# EAGLE board displayplank (EAGLE 6.2)
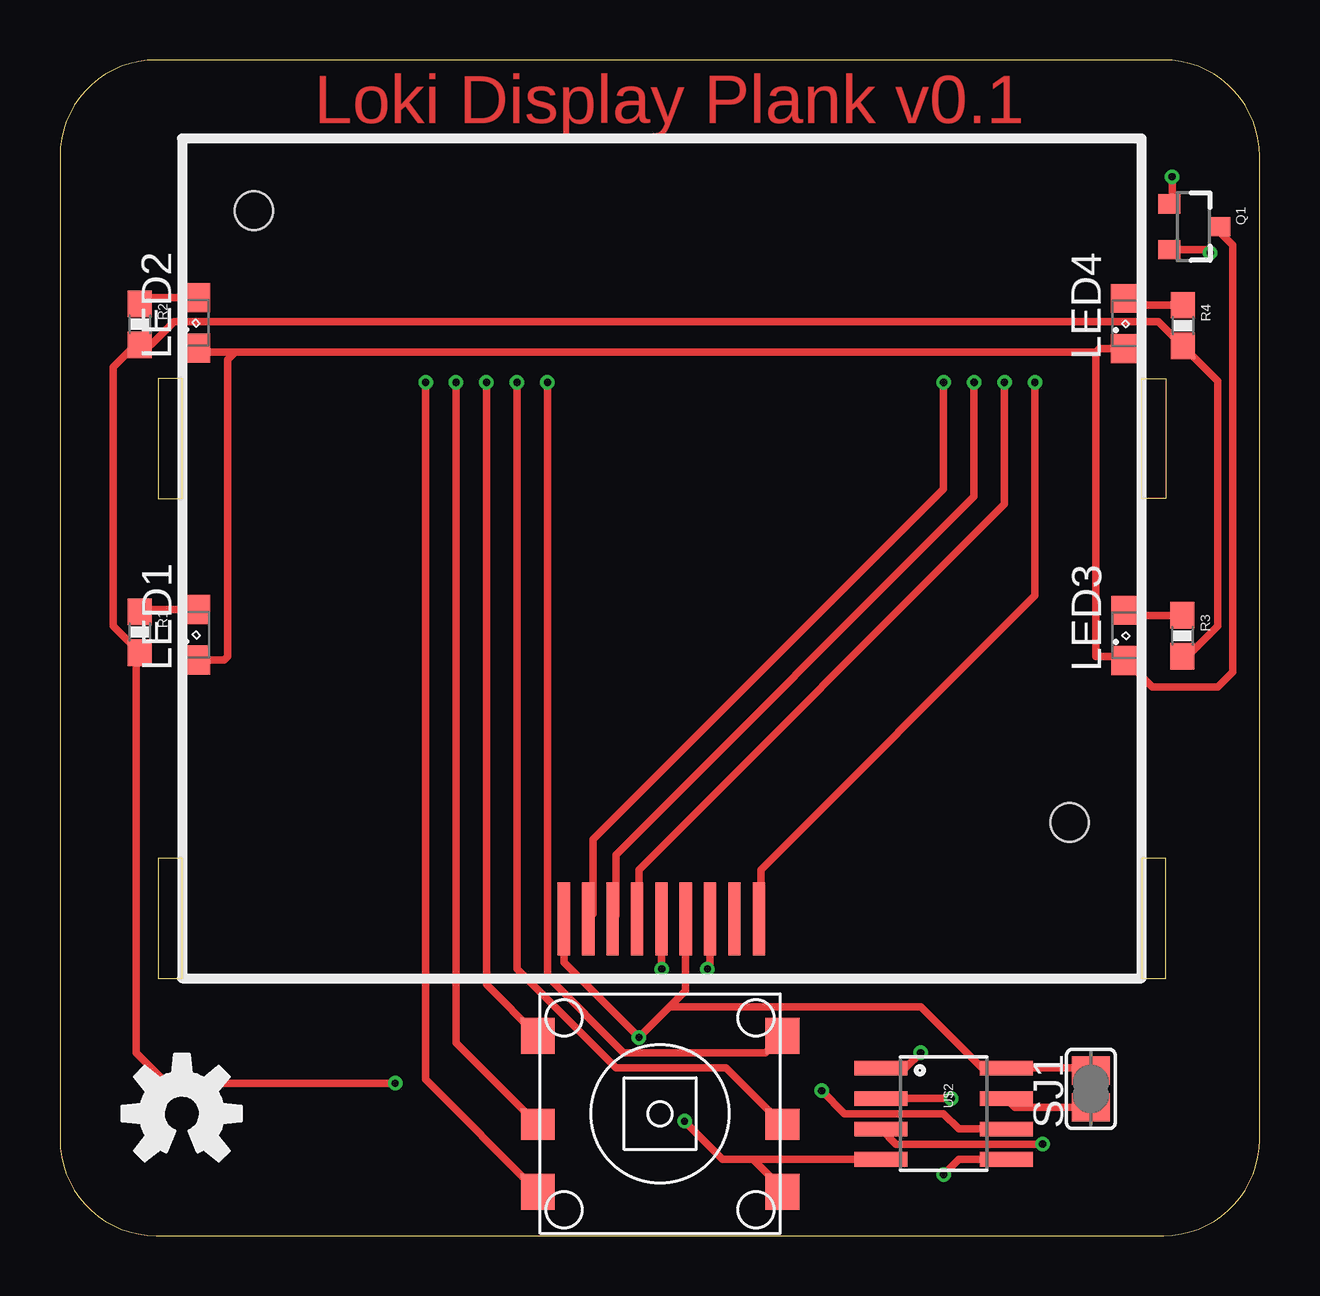
[diagram p0: board, top side]
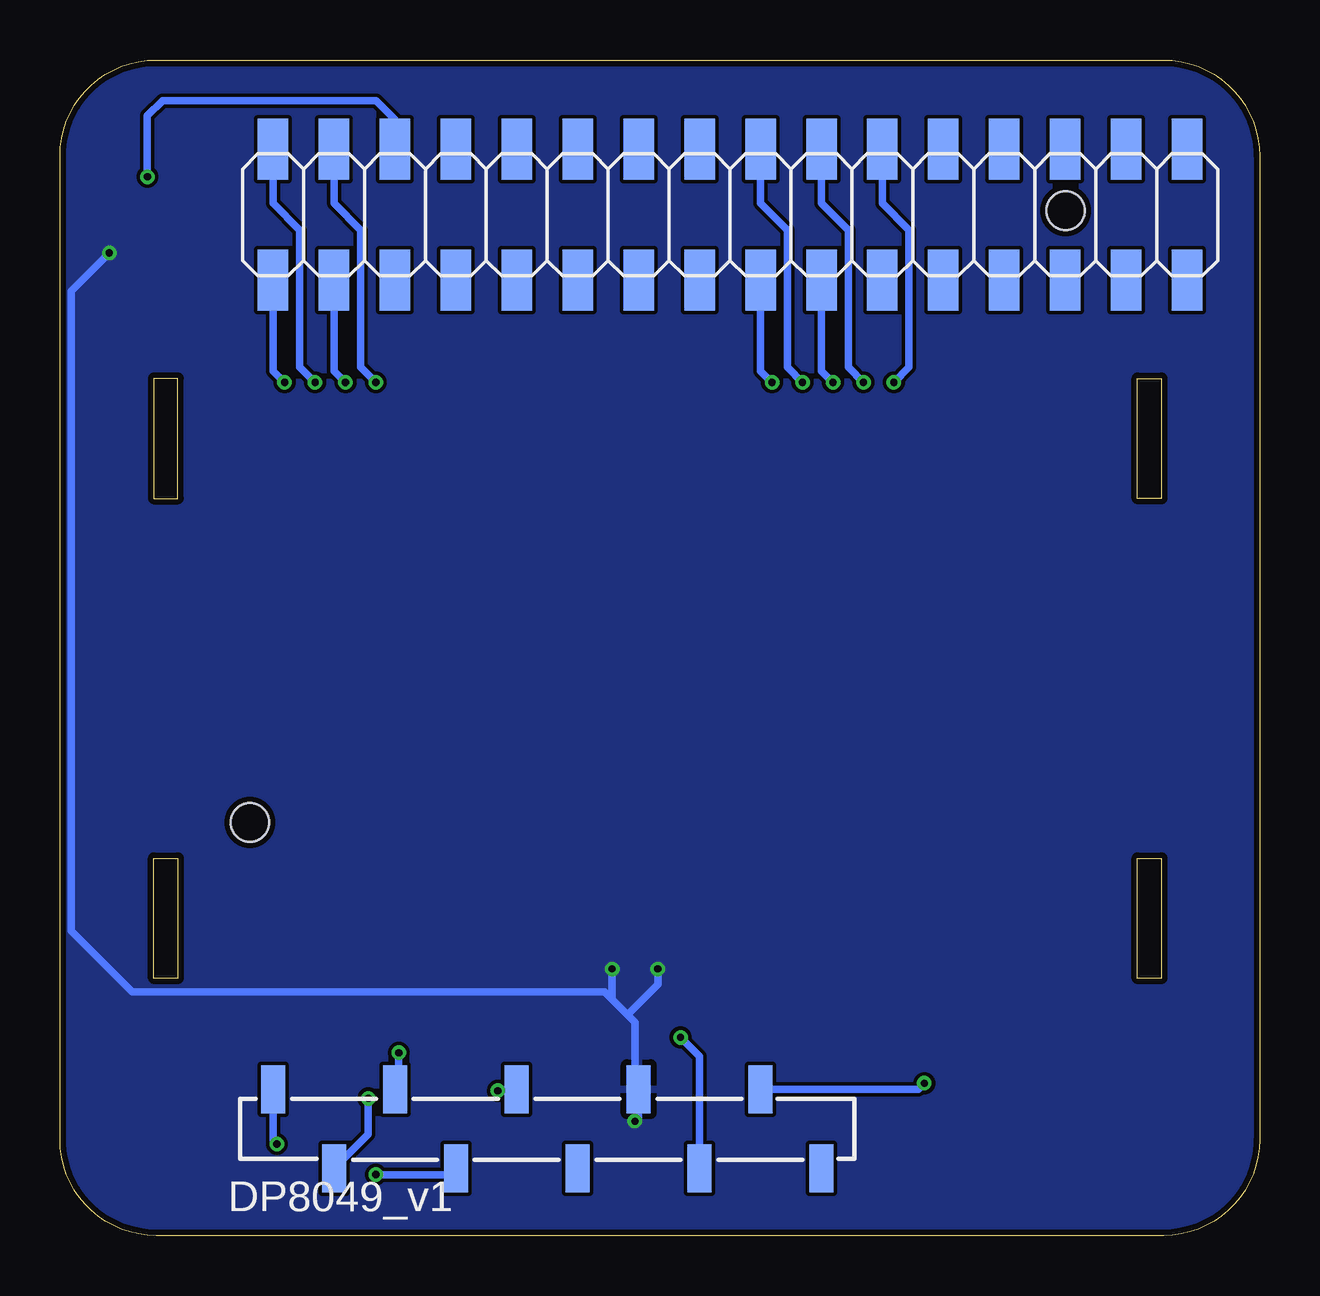
[diagram p1: board, bottom side, seen from below]

Size 50 x 49 mm. Coordinates in mm from the lower left corner, seen from the top.
Copper layers (1*16): Top 0.035mm / dielectric 1.5mm / Bottom 0.035mm
Design rules: minimum track width 6mil, minimum drill 0.3mm, track to track 6mil, track to pad 6mil, pad to pad 6mil, via to via 6mil, smd to smd 0mil, copper to edge 10mil, drill to drill 10mil, minimum pad ring 10mil, minimum via ring 6mil, stop-mask expansion 2mil, vias tented up to drill 100mil, thermal gap 10mil

## Footprints (pad centres in the part's own frame; a part is rotated, then mirrored left to right if it is on the bottom)
SML0805 = smd 1.2 x 1.2: A 1.05,0; C -1.05,0
SOT23-3 = smd 0.8 x 0.9: 1 -0.95,-1; 2 0.95,-1; 3 0,1.1
0603-RES = smd 1.1 x 1: 1 -0.85,0; 2 0.85,0
SJ = smd 1.168 x 1.6: 1 -0.762,0; 2 0.762,0
TOP_PLANK_SHORT_NOHOLES = smd 1.27 x 2.54 bottom: I1.1 41.12,45.275; I1.2 41.12,39.815; I1.3 38.58,45.275; I1.4 38.58,39.815; I1.5 36.04,45.275; I1.6 36.04,39.815; I1.7 33.5,45.275; I1.8 33.5,39.815; I1.9 30.96,45.275; I1.10 30.96,39.815; I1.11 28.42,45.275; I1.12 28.42,39.815; I1.13 25.88,45.275; I1.14 25.88,39.815; I1.15 23.34,45.275; I1.16 23.34,39.815; I2.1 20.8,45.275; I2.2 20.8,39.815; I2.3 18.26,45.275; I2.4 18.26,39.815; I2.5 15.72,45.275; I2.6 15.72,39.815; I2.7 13.18,45.275; I2.8 13.18,39.815; I2.9 10.64,45.275; I2.10 10.64,39.815; I2.11 8.1,45.275; I2.12 8.1,39.815; I2.13 5.56,45.275; I2.14 5.56,39.815; I2.15 3.02,45.275; I2.16 3.02,39.815 | smd 1 x 2 bottom: I+3V3 23.34,2.795; I+5V 20.8,6.095; IA0 36.04,6.095; IA1 38.58,2.795; IA2 41.12,6.095; IGND 25.88,6.095; IRST 28.42,2.795; ISCL 30.96,6.095; ISDA 33.5,2.795; IVIN 18.26,2.795
SO08 = smd 0.61 x 2.21: 1 -1.905,-2.616; 2 -0.635,-2.616; 3 0.635,-2.616; 4 1.905,-2.616; 5 1.905,2.616; 6 0.635,2.616; 7 -0.635,2.616; 8 -1.905,2.616
JOYSTICK-10MM = smd 1.4 x 1.5: 1 -5.1,3.25; 3 -5.1,-3.25; 4 5.1,-3.25; 6 5.1,3.25 | smd 1.4 x 1.3: 2 -5.1,-0.45; 5 5.1,-0.45
5110-SCREEN = smd 0.508 x 3.048: P$1 15.954,32.524; P$2 16.97,32.524; P$3 17.986,32.524; P$4 19.002,32.524; P$5 20.018,32.524; P$6 21.034,32.524; P$7 22.05,32.524; P$8 23.066,32.524; P$9 24.082,32.524 | hole 1.6: 3,28.5; 37,3

## Placement (x,y rotation side)
LED1  [SML0805]  5.67,25.05 90 top
LED2  [SML0805]  5.66,38.05 90 top
LED3  [SML0805]  44.42,25.02 90 top
LED4  [SML0805]  44.41,38.02 90 top
Q1  MOSFET-NCHANNELSMD  [SOT23-3]  47.24,42.05 270 top
R1  340  [0603-RES]  3.32,25.15 270 top
R2  340  [0603-RES]  3.32,37.98 270 top
R3  340  [0603-RES]  46.78,25 270 top
R4  340  [0603-RES]  46.8,37.93 270 top
SJ1  [SJ]  42.97,6.11 90 top
U$1  LOKI_TOP_PLANKSHORT_NOHOLES  [TOP_PLANK_SHORT_NOHOLES]  0,0 0 top
U$2  EEPROM-I2CSMD  [SO08]  36.83,5.08 270 top
U$3  JOYSTICK-10MM  [JOYSTICK-10MM]  25.02,5.08 0 top
U$4  [OSHW-LOGO-M]  5.08,5.08 0 top
U$5  5110-SCREEN  [5110-SCREEN]  45.09,45.72 180 top

## Library data of the parts
LED1-LED4 = led
Q1 = SparkFun-DiscreteSemi
R1-R4 = SparkFun-Passives
SJ1 = jumper
U$1 = loki
U$2 = SparkFun-DigitalIC
U$3 = nickparts
U$4 = SparkFun-Aesthetics
U$5 = ElectricLaboratoryLib

## Nets
+3V3: SJ1.2 U$1.I+3V3 U$2.8 U$5.P$4 U$5.P$9
+5V: R1.2 R2.2 R3.2 R4.2 U$1.I+5V
A0: U$1.IA0 U$2.1
A1: U$1.IA1 U$2.2
A2: U$1.IA2 U$2.3
D/C: U$1.I1.1 U$5.P$6
GND: Q1.2 U$1.IGND U$2.4 U$3.4 U$5.P$3 U$5.P$5
LIGHT: Q1.1 U$1.I1.5
N$1: SJ1.1 U$2.7
N$2: LED1.A R1.1
N$3: LED2.A R2.1
N$4: LED3.A R3.1
N$5: LED4.A R4.1
N$6: LED1.C LED2.C LED3.C LED4.C Q1.3
N$7: U$1.I2.4 U$3.1
N$8: U$1.I2.2 U$3.6
N$9: U$1.I2.3 U$3.2
N$10: U$1.I2.5 U$3.3
N$11: U$1.I2.1 U$3.5
RES: U$1.I1.2 U$5.P$1
RST: U$1.IRST
SCL: U$1.ISCL U$2.6
SCLK: U$1.I1.3 U$5.P$8
SDA: U$1.ISDA U$2.5
SDIN: U$1.I1.4 U$5.P$7
V+: U$1.IVIN

## Tracks (layer width: path | path; a pad name or v marks a point on that pad's centre or on a via)
+3V3  (via drill 0.3)
  Top 0.305: SJ1.2 42.86,6.99 U$2.8 38.42,6.99 37.15,8.26 35.88,9.53 25.4,9.53 | 25.4,9.53 v24.13,8.26 21,11.38 U$5.P$9 | U$5.P$4 26.08,10.21 25.4,9.53
  Bottom 0.305: U$1.I+3V3 23.34,7.46 | 23.34,7.46 v24.13,8.26 23.34,7.46
+5V  (via drill 0.3)
  Top 0.305: R3.2 47.01,24.15 48.26,25.4 48.26,35.62 R4.2 45.78,38.1 4.76,38.1 3.79,37.13 R2.2 3.16,37.13 2.22,36.2 2.22,25.4 R1.2 3.17,24.16 3.17,7.62 4.45,6.35 v13.97,6.35
  Bottom 0.305: U$1.I+5V 14.22,6.09 v13.97,6.35
A0  (via drill 0.3)
  Top 0.305: U$2.1 35.24,6.99 v35.88,7.62
  Bottom 0.305: v35.88,7.62 35.88,6.26 U$1.IA0
A1  (via drill 0.3)
  Top 0.305: U$2.2 v37.15,5.71
  Bottom 0.305: v37.15,5.71 37.15,4.23 U$1.IA1
A2  (via drill 0.3)
  Top 0.305: v40.96,3.81 34.85,3.81 U$2.3
  Bottom 0.305: U$1.IA2 41.12,3.97 v40.96,3.81
D/C  (via drill 0.3)
  Top 0.305: v39.37,35.56 39.37,30.48 24.13,15.24 24.13,13.28 U$5.P$6
  Bottom 0.305: U$1.I1.1 41.12,43.02 40.01,41.91 40.01,36.2 v39.37,35.56
GND  (via drill 0.3)
  Top 0.305: U$2.4 31.75,3.17 | 31.75,3.17 31.46,3.17 | v26.04,4.76 27.62,3.17 28.89,3.17 | 28.89,3.17 31.75,3.17 | U$3.4 30.11,1.95 28.89,3.17 | Q1.2 47.8,41.1 v47.94,40.96 | U$5.P$3 27.1,11.22 v26.99,11.11 | U$5.P$5 25.07,11.13 v25.08,11.11
  Bottom 0.305: v26.04,4.76 25.88,4.92 U$1.IGND 26.04,6.25 26.04,8.89 26.35,9.21 | 26.83,9.68 27.3,10.16 46.99,10.16 49.53,12.7 49.53,39.37 v47.94,40.96 | 26.83,9.68 26.35,9.21 | v26.99,11.11 26.99,9.84 26.83,9.68 | v25.08,11.11 25.08,10.48 26.35,9.21
  pour Bottom: 0,0 0,49.53 50.8,49.53 50.8,0
LIGHT  (via drill 0.3)
  Top 0.305: v46.35,44.13 46.35,43.12 Q1.1
  Bottom 0.305: U$1.I1.5 36.04,46.52 36.83,47.31 45.72,47.31 46.35,46.67 v46.35,44.13
N$1
  Top 0.305: SJ1.1 39.81,5.35 U$2.7
N$2
  Top 0.305: LED1.A 3.42,26.09 R1.1
N$3
  Top 0.305: LED2.A 3.58,39.09 R2.1
N$4
  Top 0.305: R3.1 44.63,25.85 LED3.A
N$5
  Top 0.305: R4.1 44.69,38.78 LED4.A
N$6
  Top 0.305: 43.18,36.83 43.18,35.56 43.18,24.13 44.26,24.13 LED3.C 45.52,22.86 48.26,22.86 48.9,23.5 48.9,41.27 48.34,41.83 Q1.3 | LED4.C 43.31,36.97 43.18,36.83 | 43.18,36.83 7.3,36.83 | 7.3,36.83 5.82,36.83 LED2.C | LED1.C 6.85,24 6.99,24.13 6.99,36.51 7.3,36.83
N$7  (via drill 0.3)
  Top 0.305: v17.78,35.56 17.78,10.46 U$3.1
  Bottom 0.305: U$1.I2.4 18.26,36.04 v17.78,35.56
N$8  (via drill 0.3)
  Top 0.305: v20.32,35.56 20.32,10.79 23.5,7.62 29.41,7.62 U$3.6
  Bottom 0.305: U$1.I2.2 20.8,36.04 v20.32,35.56
N$9  (via drill 0.3)
  Top 0.305: v16.51,35.56 16.51,8.04 U$3.2
  Bottom 0.305: U$1.I2.3 18.26,43.02 17.14,41.91 17.14,36.2 v16.51,35.56
N$10  (via drill 0.3)
  Top 0.305: v15.24,35.56 15.24,6.5 U$3.3
  Bottom 0.305: U$1.I2.5 15.72,43.02 14.61,41.91 14.61,36.2 v15.24,35.56
N$11  (via drill 0.3)
  Top 0.305: v19.05,35.56 19.05,11.11 23.18,6.99 27.76,6.99 U$3.5
  Bottom 0.305: U$1.I2.1 20.8,43.02 19.68,41.91 19.68,36.2 v19.05,35.56
RES  (via drill 0.3)
  Top 0.305: v40.64,35.56 40.64,26.67 29.21,15.24 29.21,13.28 U$5.P$1
  Bottom 0.305: U$1.I1.2 41.12,36.04 v40.64,35.56
SCL  (via drill 0.3)
  Top 0.305: U$2.6 37.47,4.45 36.83,5.08 32.7,5.08 v31.75,6.03
  Bottom 0.305: v31.75,6.03 31.02,6.03 U$1.ISCL
SCLK  (via drill 0.3)
  Top 0.305: v36.83,35.56 36.83,31.11 22.23,16.51 22.23,13.4 U$5.P$8
  Bottom 0.305: U$1.I1.3 38.58,43.02 37.47,41.91 37.47,36.2 v36.83,35.56
SDA  (via drill 0.3)
  Top 0.305: U$2.5 37.47,3.17 v36.83,2.54
  Bottom 0.305: v36.83,2.54 33.76,2.54 U$1.ISDA
SDIN  (via drill 0.3)
  Top 0.305: v38.1,35.56 38.1,30.8 23.18,15.88 23.18,13.34 U$5.P$7
  Bottom 0.305: U$1.I1.4 38.58,36.04 v38.1,35.56

## Text on the board
Top: Loki Display Plank v0.1